# Altium PCB Lora_Count.PcbDoc
Units mm, origin at the board's own origin, x right, y up, seen from the top; angles counter-clockwise.
Board outline 53.3 x 32 mm, 2 copper layers (Top Layer, Bottom Layer), stack 1.481 mm thick; 67 components, 53 nets, 243 pads, 241 vias.
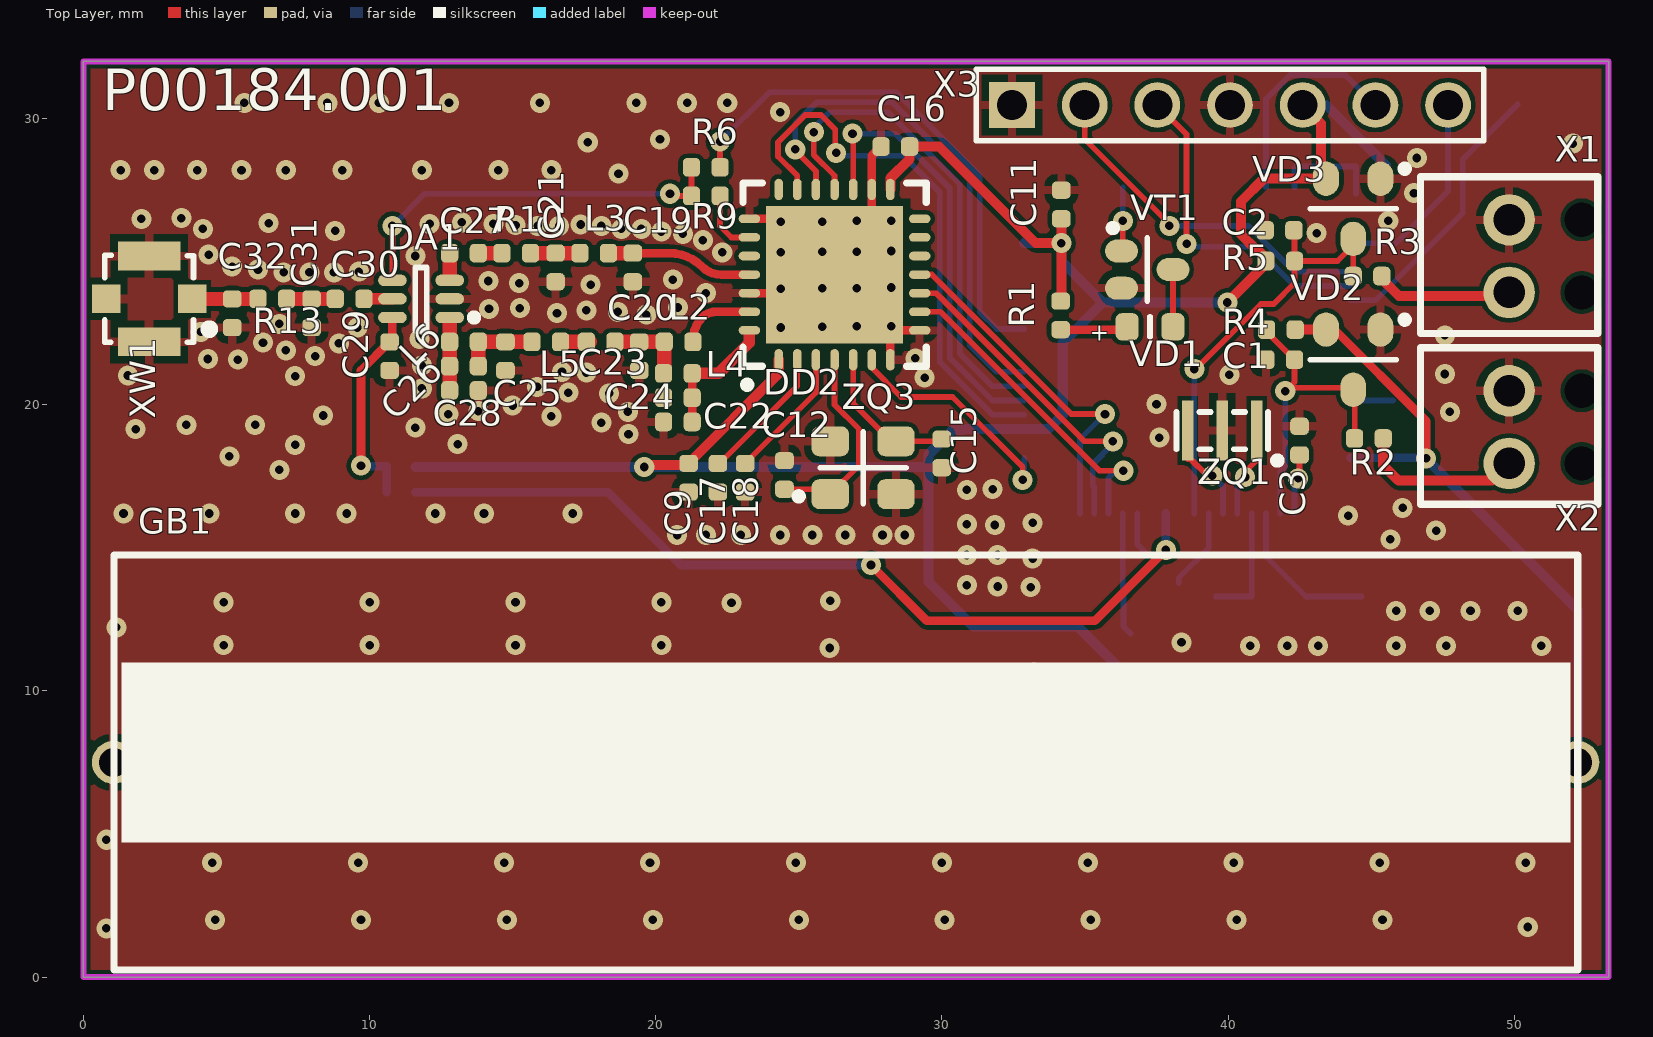
[diagram p0: Top Layer view]
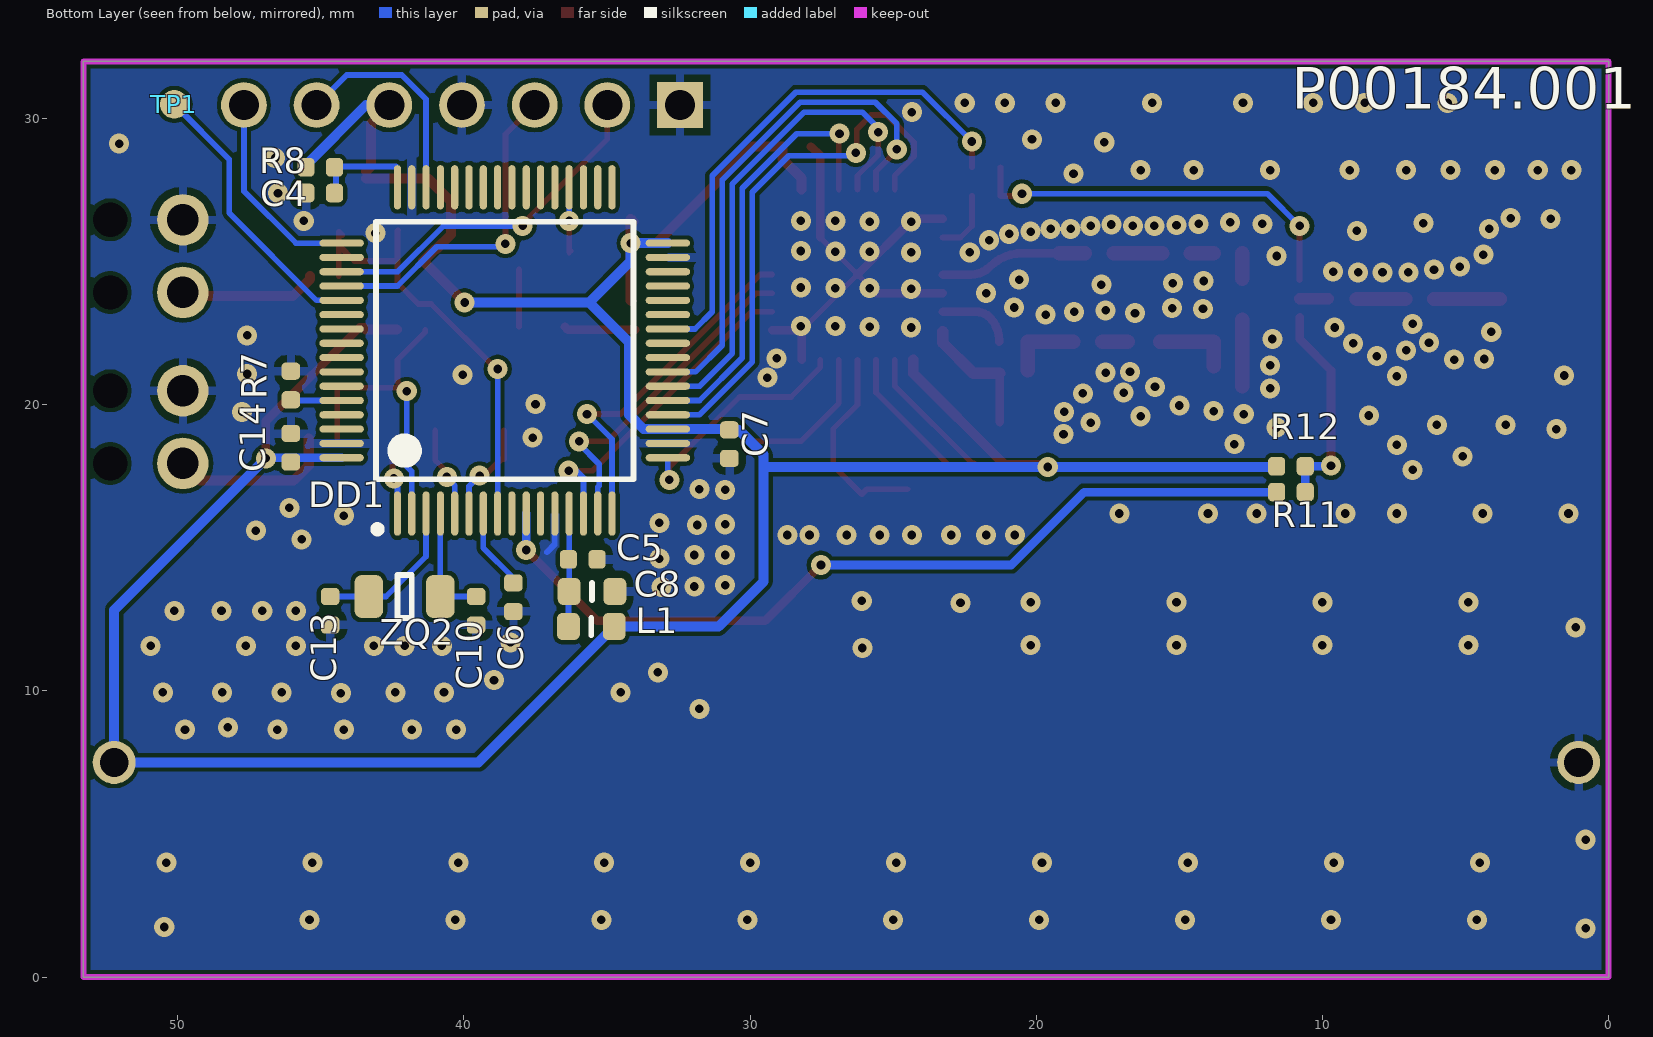
[diagram p1: Bottom Layer view, seen from below]
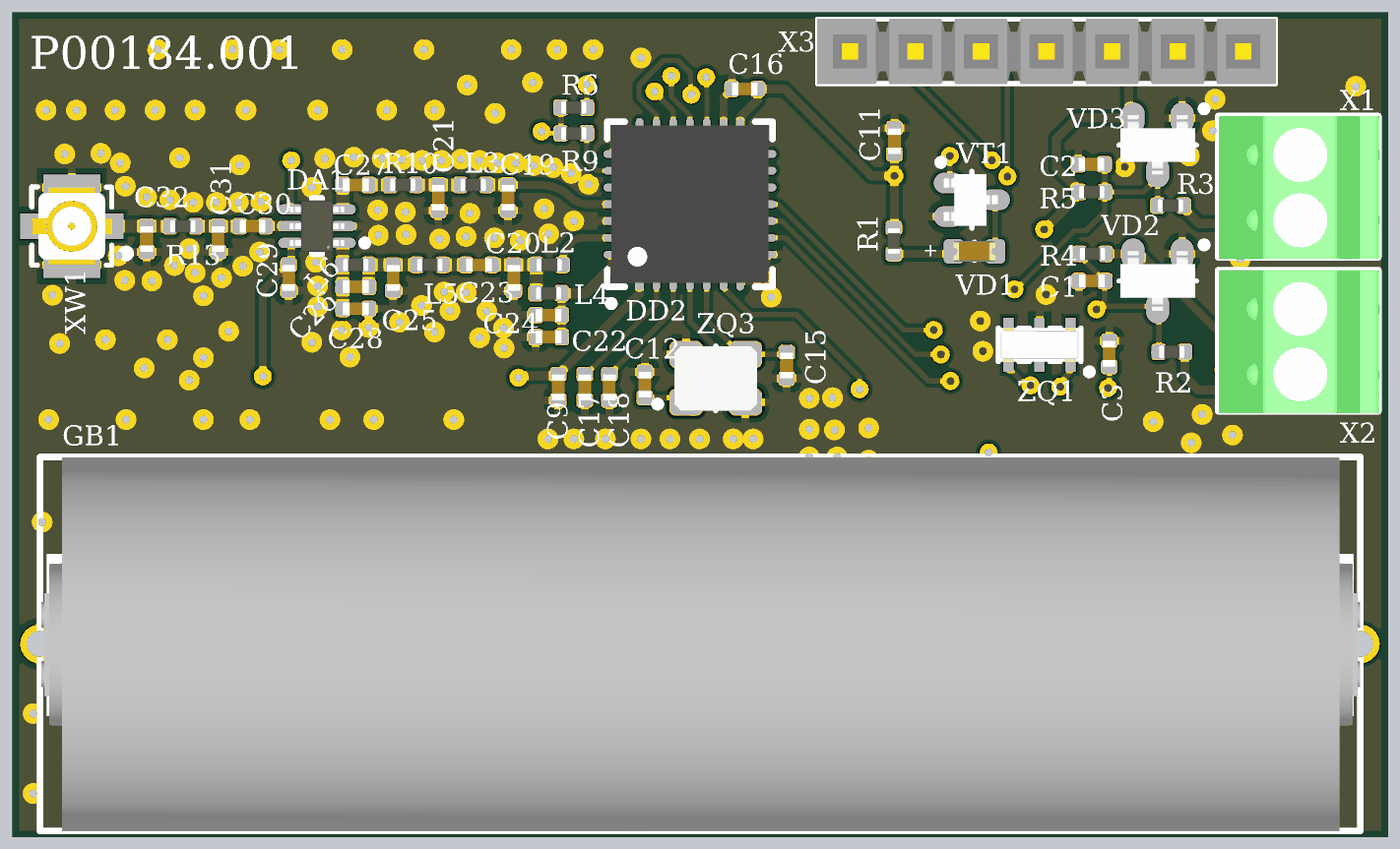
[diagram p2: 3D render of the assembled board from above, using the file's embedded part models]
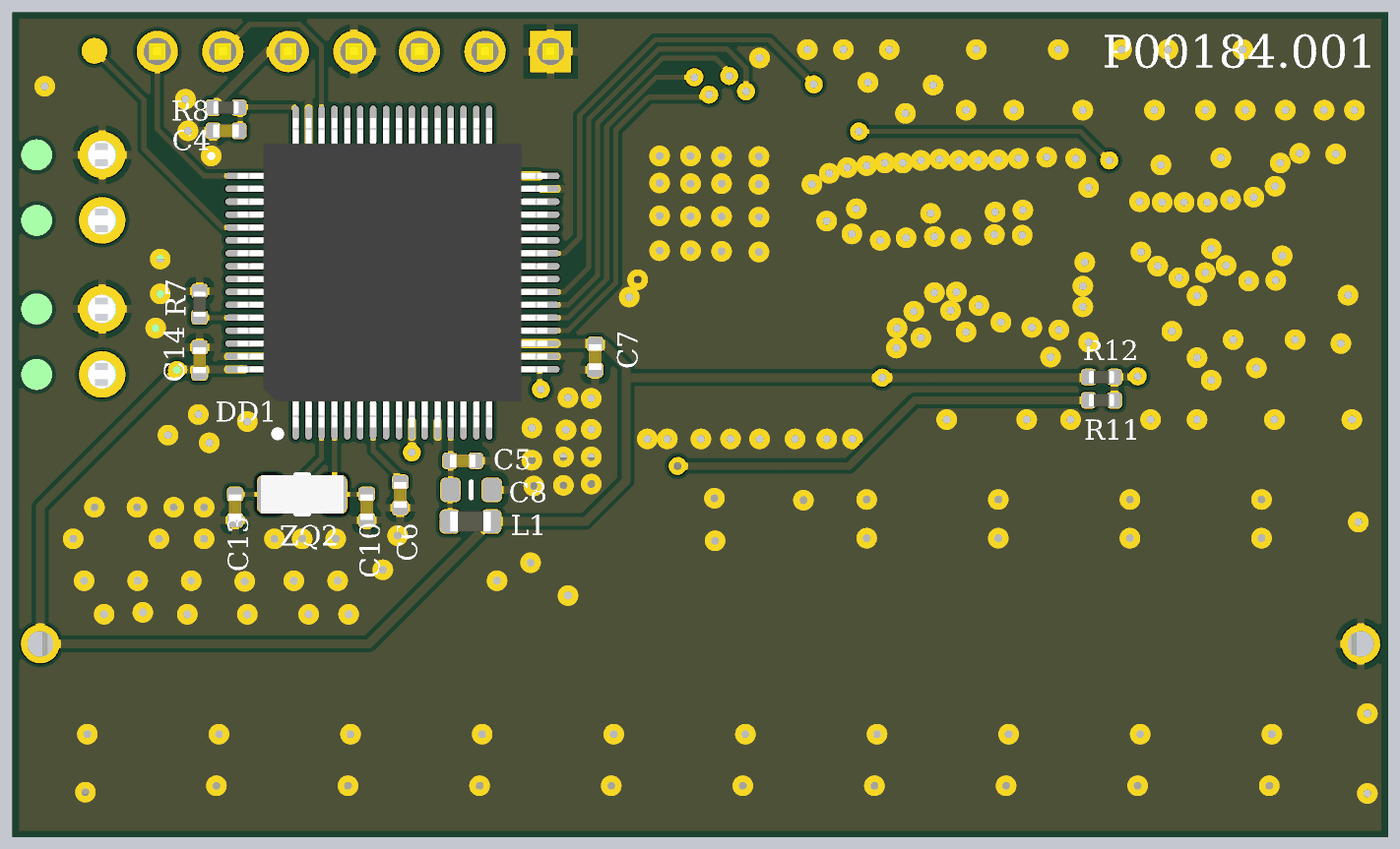
[diagram p3: 3D render of the assembled board from below, using the file's embedded part models]

## Layer stack, top to bottom
Top Solder: solder mask 0.0102, Solder Resist, Dk 3.5
Top Layer: signal copper 0.0356
Dielectric 1: dielectric 1.41, FR-4, Dk 4.8
Bottom Layer: signal copper 0.0356
Bottom Solder: solder mask 0.0102, Solder Resist, Dk 3.5

## Board outline
0,0 53.3,0 53.3,32 0,32

## Design rules (kind name [scope] priority, off if disabled: settings)
AssemblyTestPointUsage [All] p1 off:
AssemblyTestpoint [All] p1 off: testpointundercomponent=TRUE minsize=1.016 maxsize=2.54 preferedsize=1.524 minholesize=0 maxholesize=1.016 preferedholesize=0.813 testpointgrid=0.025 usegrid=TRUE gridtolerance=0 allowsidetop=TRUE allowsidebottom=TRUE
Clearance Galvanica [InNet('485_GND') vs InNet('GND')or InNet('GPIO3') or InNet('GPO')] p1: gap=0.5
Clearance [InComponent('DA1')] p2: gap=0.15
Clearance mid [OnLayer('Mid-Layer 1')      or OnLayer('Mid-Layer 2') vs IsKeepOut] p3: gap=0.5
Clearance NC_to_All [(ObjectKind = 'Pad') And (Net = 'No Net') And (HoleDiameter = PadXSize_AllLayers) And (PadShape_AllLayers = 'Round') And (HoleType = 'Round') vs IsElectrical] p4: gap=0.25
Clearance All_net [All] p5: gap=0.15
ComponentClearance [All] p1 off: gap=0.254 collisioncheckmode=3 verticalgap=0.254 showdistances=FALSE
FabricationTestPointUsage [All] p1 off: valid=0 allowmultiple=FALSE
FabricationTestpoint [All] p1 off: side=3 testpointundercomponent=TRUE minsize=1.016 maxsize=2.54 preferedsize=1.524 minholesize=0 maxholesize=1.016 preferedholesize=0.813 testpointgrid=0.025 allowsidetop=TRUE allowsidebottom=TRUE usegrid=TRUE gridtolerance=0
Height [All] p1 off: minheight=0 maxheight=25.4 prefheight=12.7
HoleSize [All] p1: absolutevalues=TRUE maxlimit=3.5 minlimit=0.025 maxpercent=80.000 minpercent=20.000
MinimumSolderMaskSliver [All] p1: minsoldermaskwidth=0.05
PolygonConnect LDO [InComponent('DA9') vs IsNamedPolygon('power')] p1: connectstyle=Direct reliefconductorwidth=0.254 reliefentries=4 polygonreliefangle="90 Angle" airgapwidth=0.254
PolygonConnect Direct [IsNamedPolygon('POWER')] p2: connectstyle=Direct reliefconductorwidth=0.254 reliefentries=4 polygonreliefangle="90 Angle" airgapwidth=0.254
PolygonConnect DirectVIA_PAD [(IsVia And InNet('GND')) or (IsVia And InNet('485_GND'))] p3: connectstyle=Direct reliefconductorwidth=0.254 reliefentries=4 polygonreliefangle="90 Angle" airgapwidth=0.254
PolygonConnect PolygonConnectALL [All] p4: connectstyle=Relief reliefconductorwidth=0.3 reliefentries=4 polygonreliefangle="90 Angle" airgapwidth=0.254
RoutingLayers AllNets [All] p1: top layer_v5=TRUE bottom layer_v5=TRUE
RoutingPriority RoutingPriority_2 [InNetClass('Signal')] p1: routingpriority=0
RoutingPriority DGND [InNetClass('Digiral GND')] p2: routingpriority=2
RoutingTopology topolGNDPWR [InNetClass('Digiral GND')or InNetClass('DPWR')] p1: topology=Shortest
RoutingTopology Signal [InNetClass('Signal')] p2: topology=Daisy_MidDriven
RoutingTopology Rout220V [InNetClass('220V Line')] p3: topology=Daisy_Simple
RoutingVias RoutingViasGNDPWR [All] p1: holewidth=0.4 width=0.9 viastyle="Through Hole" minholewidth=0.2 minwidth=0.6 maxholewidth=0.5 maxwidth=1.1
RoutingVias RoutingViasDef [All] p2: holewidth=0.4 width=0.9 viastyle="Through Hole" minholewidth=0.2 minwidth=0.6 maxholewidth=0.4 maxwidth=0.9
SilkToSilkClearance [All] p1 off: silktosilkclearance=0.254
SilkToSolderMaskClearance SilkscreenOverComponentPads [IsPad] p1 off: minsilkscreentomaskgap=0.254 clearancetoexposedcopper=TRUE
SolderMaskExpansion Vias [IsVia] p1: expansion=-0.55
SolderMaskExpansion [All] p2: expansion=0.05
Width reper [InComponentClass('reper')] p1: maxlimit=0.254 minlimit=0 preferedwidth=0.254
Width all [All] p2: maxlimit=2 minlimit=0.15 preferedwidth=0.2
17 further rules are at their usual default settings.

## Components (designator, comment, footprint, x,y, rotation, side; value= is the part's Value field where it differs from the comment)
C1 "чип 0402 0.1мкФ/10V," CAPC1005X50(0402) 41.825,21.575 r0 top
C2 "чип 0402 0.1мкФ/10V," CAPC1005X50(0402) 41.8,26.1 r0 top
C3 "чип 0402 0.1мкФ/10V," CAPC1005X50(0402) 42.5,18.75 r270 top
C4 "чип 0402 0.1мкФ/10V," CAPC1005X50(0402) 45.025,27.4 r180 bottom
C5 "чип 0402 0.1мкФ/10V," CAPC1005X50(0402) 35.85,14.6 r0 bottom
C6 "чип 0402 0.1мкФ/10V," CAPC1005X50(0402) 38.275,13.275 r90 bottom
C7 "чип 0402 0.1мкФ/10V," CAPC1005X50(0402) 30.725,18.625 r90 bottom
C8 "чип 0603 4.7мкФ/50V," CAPC1608X50(0603) 35.525,13.475 r0 bottom
C9 "чип 0402 0.1мкФ/10V," CAPC1005X50(0402) 21.15,17.45 r90 top
C10 "чип 0402 10/10V," CAPC1005X50(0402) 39.575,12.8 r90 bottom
C11 "чип 0402 0.1мкФ/10V," CAPC1005X50(0402) 34.175,27 r270 top
C12 "чип 0402 10/10V," CAPC1005X50(0402) 24.5,17.55 r270 top
C13 "чип 0402 10/10V," CAPC1005X50(0402) 44.675,12.8 r90 bottom
C14 "чип 0402 0.1мкФ/10V," CAPC1005X50(0402) 46.05,18.5 r270 bottom
C15 "чип 0402 10/10V," CAPC1005X50(0402) 30,18.3 r90 top
C16 "чип 0402 0.1мкФ/10V," CAPC1005X50(0402) 28.375,29.025 r0 top
C17 "чип 0402 0.1мкФ/10V," CAPC1005X50(0402) 22.175,17.45 r90 top
C18 "чип 0402 0.1мкФ/10V," CAPC1005X50(0402) 23.125,17.45 r90 top
C19 "чип 0402 1.5/10V," CAPC1005X50(0402) 19.2,24.8 r90 top
C20 "чип 0402 8.2/10V," CAPC1005X50(0402) 19.425,21.7 r90 top
C21 "чип 0402 3.3/10V," CAPC1005X50(0402) 16.5,24.8 r90 top
C22 "чип 0402 0.01мкФ/10V," CAPC1005X50(0402) 20.775,19.4 r0 top
C23 "чип 0402 22/10V," CAPC1005X50(0402) 18.075,22.2 r0 top
C24 "чип 0402 47/10V," CAPC1005X50(0402) 20.775,20.25 r0 top
C25 "чип 0402 8.2/10V," CAPC1005X50(0402) 14.75,21.7 r90 top
C26 "чип 0402 1.5/10V," CAPC1005X50(0402) 13.3,21.35 r0 top
C27 "чип 0402 47/10V," CAPC1005X50(0402) 13.3,25.3 r0 top
C28 "чип 0402 3.3/10V," CAPC1005X50(0402) 13.3,20.5 r180 top
C29 "чип 0402 0.01мкФ/10V," CAPC1005X50(0402) 10.7,21.7 r270 top
C30 "чип 0402 47/10V," CAPC1005X50(0402) 9.3,23.7 r0 top
C31 "чип 0402 NC/10V," CAPC1005X50(0402) 7.975,23.2 r270 top
C32 "чип 0402 NC/10V," CAPC1005X50(0402) 5.2,23.2 r270 top
DA1 "PE4259" SOT65P210X110-6N(SOT363) 11.8,23.7 r180 top
DD1 "STM32l073RZT" TSQFP50P1200X1200X160-64N 38.575,21.9 r90 bottom
DD2 "SX1272IMLTRT" QFN65P600X600X100_HS-29N 26.25,24.55 r90 top
GB1 "ER14505-VY" ER14505-VY 52.225,7.5 r180 top
L1 "BLM18AG121SN1D" RESC1608X45(0603) 35.55,12.25 r0 bottom
L2 "2.7нГн" RESC1005X35(0402) 20.8,22.2 r180 top
L3 "10нГн" RESC1005X35(0402) 17.85,25.3 r180 top
L4 "33нГн" RESC1005X35(0402) 20.775,21.1 r0 top
L5 "5.6нГн" RESC1005X35(0402) 16.175,22.2 r180 top
L6 "5.6нГн" RESC1005X35(0402) 13.3,22.2 r180 top
R1 "чип 0402 200 5%" RESC1005X35(0402) 34.15,23.125 r270 top
R2 "чип 0402 10k 5%" RESC1005X35(0402) 44.925,18.825 r0 top
R3 "чип 0402 10k 5%" RESC1005X35(0402) 44.875,24.5 r0 top
R4 "чип 0402 1M 5%" RESC1005X35(0402) 41.85,22.625 r180 top
R5 "чип 0402 1M 5%" RESC1005X35(0402) 41.825,25.025 r0 top
R6 "чип 0402 10 5%" RESC1005X35(0402) 21.75,28.3 r180 top
R7 "чип 0402 0 5%" RESC1005X35(0402) 46.05,20.675 r270 bottom
R8 "чип 0402 0 5%" RESC1005X35(0402) 45.025,28.3 r180 bottom
R9 "чип 0402 10 5%" RESC1005X35(0402) 21.75,27.3 r180 top
R10 "чип 0402 0 5%" RESC1005X35(0402) 15.125,25.3 r180 top
R11 "чип 0402 0 5%" RESC1005X35(0402) 11.1,16.95 r0 bottom
R12 "чип 0402 0 5%" RESC1005X35(0402) 11.1,17.85 r0 bottom
R13 "чип 0402 0 5%" RESC1005X35(0402) 6.6,23.7 r180 top
TP1 "TX_Uart5" TEST_POINT 50.125,30.5 r270 bottom
VD1 "чип 0603 LED (RED)" LEDC1608X80N(0603)_red 37.275,22.725 r180 top
VD2 "BAV99-7-F" SOT95P230-3N(SOT23)_NUM 44.375,21.575 r270 top
VD3 "BAV99-7-F" SOT95P230-3N(SOT23)_NUM 44.375,26.85 r270 top
VT1 "MUN5211T1G" "SOT65P200X110-3N (SOT323)_NUM" 37.175,24.725 r0 top
X1 "DG308-2.54-2P" DG308-2.54-2P 49.825,23.925 r90 top
X2 "DG308-2.54-2P" DG308-2.54-2P 49.825,17.95 r90 top
X3 "PLS-7" HEADER1-7P2.54 32.45,30.475 r0 top
XW1 "73412-0110" 73412-0110 2.3,23.7 r90 top
ZQ1 "CSTCE8M00G52A-R0(4 МГц)" "XTAL320X130X120 (CSTCE_G15C)" 39.8,19.1 r180 top
ZQ2 "DST310S(32.768 KHz)" XTAL320X150X90-2N(DST) 42.075,13.3 r0 bottom
ZQ3 "KX-7T-12.88662 12MHz(32MHz)" XTAL320X250X78-4N(ADM8) 27.25,17.8 r0 top

## Footprints (in the part's own frame and the unit in brackets; to place one, negate y for a bottom-side part, rotate by r counter-clockwise, add the part's x,y. Pads: shape width x height; smd on the part's side, far side on the other; paste and mask are expansions set on the pad)
73412-0110 [mm] "Micro coaxial connector receptacle vertical"
  rect 1x1 smd: 1(0,-1.5) 2(0,1.5)
  rect 1x2.2 smd: 2(-1.5,0) 2(1.5,0)
  silkscreen extent -1.51,-2.16 1.53,1.55, body extent -1.5,-1.55 1.5,1.55, height 1.25
CAPC1005X50(0402) [mm]
  rrect50% 0.6x0.65 smd paste-0.025: 1(-0.5,0) 2(0.5,0)
  body extent -0.5,-0.25 0.5,0.25, height 0.6
CAPC1608X50(0603) [mm]
  rrect50% 0.8x0.95 smd paste-0.025: 1(-0.8,0) 2(0.8,0)
  silkscreen extent 0,-0.3 0,0.3, body extent -0.8,-0.4 0.8,0.4, height 0.5
DG308-2.54-2P [mm]
  round 0 hole 1.2 unplated: 0(0,-2.54) 0(2.54,-2.54)
  round 1.8 hole 1.1: 1(0,0) 2(2.54,0)
  silkscreen extent -1.43,-3.1 4.05,3.1, body extent -1.5,-3.13 4.04,3.07, height 8.5
ER14505-VY [mm]
  round 1.5 hole 1: 1(0,0) 2(51.175,0)
  silkscreen extent 0,-7.25 51.16,7.25, body extent 0,-7.22 51.1,7.28, height 15.74
HEADER1-7P2.54 [mm]
  rect 1.6x1.6 hole 1.05: 1(0,0)
  round 1.6 hole 1.05: 2(2.54,0) 3(5.08,0) 4(7.62,0) 5(10.16,0) 6(12.7,0) 7(15.24,0)
  silkscreen extent -1.25,-1.25 16.49,1.25, body extent -1.27,-1.27 16.51,1.27, height 8.14
LEDC1608X80N(0603)_red [mm]
  rrect50% 0.8x0.95 smd: A(0.8,0) C(-0.8,0)
  silkscreen extent 0,-0.35 0,0.35, body extent -0.81,-0.4 0.81,0.4, height 0.6
QFN65P600X600X100_HS-29N [mm] "QFN, 28-Leads, Body 6.00x6.00mm, Pitch 0.65mm, Thermal Pad 4.80x4.80mm, IPC Medium Density"
  oval 0.75x0.3 smd: 1(-2.975,1.95) 2(-2.975,1.3) 3(-2.975,0.65) 4(-2.975,0) 5(-2.975,-0.65) 6(-2.975,-1.3) 7(-2.975,-1.95) 15(2.975,-1.95) 16(2.975,-1.3) 17(2.975,-0.65) 18(2.975,0) 19(2.975,0.65) 20(2.975,1.3) 21(2.975,1.95)
  oval 0.3x0.75 smd: 8(-1.95,-2.975) 9(-1.3,-2.975) 10(-0.65,-2.975) 11(0,-2.975) 12(0.65,-2.975) 13(1.3,-2.975) 14(1.95,-2.975) 22(1.95,2.975) 23(1.3,2.975) 24(0.65,2.975) 25(0,2.975) 26(-0.65,2.975) 27(-1.3,2.975) 28(-1.95,2.975)
  rect 4.8x4.8 smd: 29(0,0)
  silkscreen extent -3.97,-3.2 3.2,3.2, body extent -3.05,-3.05 3.05,3.05, height 1
RESC1005X35(0402) [mm]
  rrect50% 0.6x0.65 smd paste-0.025: 1(-0.5,0) 2(0.5,0)
  body extent -0.5,-0.25 0.5,0.25, height 0.38
RESC1608X45(0603) [mm]
  rrect50% 0.8x0.95 smd paste-0.025: 1(-0.8,0) 2(0.8,0)
  silkscreen extent 0,-0.3 0,0.3, body extent -0.8,-0.4 0.8,0.4, height 0.5
"SOT65P200X110-3N (SOT323)_NUM" [mm]
  oval 1.15x0.8 smd: 1(-0.9,0.65) 2(-0.9,-0.65) 3(0.9,0)
  silkscreen extent -1.32,-1.1 0,1.57, body extent -1.1,-1 1,1, height 0.95
SOT65P210X110-6N(SOT363) [mm]
  oval 1x0.4 smd: 1(-1,0.65) 2(-1,0) 3(-1,-0.65) 4(1,-0.65) 5(1,0) 6(1,0.65)
  silkscreen extent -1.98,-1.1 0.2,1.1, body extent -1.05,-1 1.05,1, height 0.95
SOT95P230-3N(SOT23)_NUM [mm]
  oval 1.2x0.9 smd: 1(-1.05,0.95) 2(-1.05,-0.95) 3(1.05,0)
  silkscreen extent -1.52,-1.5 0,1.92, body extent -1.15,-1.45 1.15,1.45, height 1.01
TEST_POINT [mm]
  round 1 smd paste-1: 1(0,0)
TSQFP50P1200X1200X160-64N [mm]
  oval 1.55x0.25 smd: 1(-5.7,3.75) 2(-5.7,3.25) 3(-5.7,2.75) 4(-5.7,2.25) 5(-5.7,1.75) 6(-5.7,1.25) 7(-5.7,0.75) 8(-5.7,0.25) 9(-5.7,-0.25) 10(-5.7,-0.75) 11(-5.7,-1.25) 12(-5.7,-1.75) 13(-5.7,-2.25) 14(-5.7,-2.75) 15(-5.7,-3.25) 16(-5.7,-3.75) 33(5.7,-3.75) 34(5.7,-3.25) 35(5.7,-2.75) 36(5.7,-2.25) 37(5.7,-1.75) 38(5.7,-1.25) 39(5.7,-0.75) 40(5.7,-0.25) 41(5.7,0.25) 42(5.7,0.75) 43(5.7,1.25) 44(5.7,1.75) 45(5.7,2.25) 46(5.7,2.75) 47(5.7,3.25) 48(5.7,3.75)
  oval 0.25x1.55 smd: 17(-3.75,-5.7) 18(-3.25,-5.7) 19(-2.75,-5.7) 20(-2.25,-5.7) 21(-1.75,-5.7) 22(-1.25,-5.7) 23(-0.75,-5.7) 24(-0.25,-5.7) 25(0.25,-5.7) 26(0.75,-5.7) 27(1.25,-5.7) 28(1.75,-5.7) 29(2.25,-5.7) 30(2.75,-5.7) 31(3.25,-5.7) 32(3.75,-5.7) 49(3.75,5.7) 50(3.25,5.7) 51(2.75,5.7) 52(2.25,5.7) 53(1.75,5.7) 54(1.25,5.7) 55(0.75,5.7) 56(0.25,5.7) 57(-0.25,5.7) 58(-0.75,5.7) 59(-1.25,5.7) 60(-1.75,5.7) 61(-2.25,5.7) 62(-2.75,5.7) 63(-3.25,5.7) 64(-3.75,5.7)
  silkscreen extent -6.37,-4.5 4.5,4.58, body extent -6,-6 6,6, height 1.56
"XTAL320X130X120 (CSTCE_G15C)" [mm] "Ceramic Resonators CSTCE_G15C"
  rect 0.4x2.1 smd: 1(-1.2,0) 2(0,0) 3(1.2,0)
  silkscreen extent -1.97,-0.65 1.6,1.1, body extent -1.6,-0.65 1.6,0.65, height 0.7
XTAL320X150X90-2N(DST) [mm]
  rrect50% 1x1.5 smd paste-0.025 mask+0.1: 1(-1.25,0) 2(1.25,0)
  silkscreen extent -0.25,-0.75 0.25,0.75, body extent -1.6,-0.75 1.6,0.75, height 0.9
XTAL320X250X78-4N(ADM8) [mm]
  rrect50% 1.3x1.05 smd paste-0.025 mask+0.1: 1(-1.15,-0.925) 2(1.15,-0.925) 3(1.15,0.925) 4(-1.15,0.925)
  silkscreen extent -2.37,-1.25 1.5,1.25, body extent -1.6,-1.25 1.6,1.25, height 0.7

## Part data
C1 C2 C3 C4 C5 C6 C7 C9 C10 C11 C12 C13 C14 C15 C16 C17 C18 C19 C20 C21 C22 C23 C24 C25 C26 C27 C28 C29 C30 C31 C32: library part C0402, "C0402"
C8: library part C0603, "C0603"
DA1: "SOT363 RF Switch IC General Purpose SPDT 50 Ohm"
DD1: "LQFP-64 Ultra-low-power 32-bit MCU ARM®-based Cortex®-M0+, up to 192KB  Flash, 20KB SRAM, 6KB EEPROM, LCD, USB, ADC, DACs"
DD2: "SX1272/73 - 860 MHz to 1020 MHz Low Power Long Range Transceiver"
L1: library part L0603, "Chip coil 0603"
L2 L3 L4 L5 L6: library part L0402, "Chip coil 0402"
R1 R2 R3 R4 R5 R6 R7 R8 R9 R10 R11 R12 R13: library part R0402, "R0402"
TP1: library part TEST_POINT, "TEST_POINT"
VD1: library part "LED 0603", "LED 0603"
VD2 VD3: library part BAV99, "BAV99"
VT1: "MUN5211T1"
X3: "Pin Header Single Row 7 pins"
XW1: "Micro coaxial connector receptacle vertical"
ZQ1: library part "XTAL, SMD, 3.2mm x 1.3mm, 3 pads", "CSTCE_G CERALOCK Ceramic Resonators"
ZQ2: library part "XTAL, SMD, 3.2mm x 1.5mm, 2 pads", "DST310S"
ZQ3: library part "XTAL, SMD, 3.2mm x 2.5mm, 4 pads", "KX-7T series"

## Via types
v1: diameter 0.7, hole 0.3, Top Layer to Bottom Layer, 241 vias

## Nets (pads, with @x,y where several pads share a name; then routed paths per layer and width w, separated by ;. In a path a pad name is that pad's centre, name@x,y a point inside that pad or via, vN(x,y) a via of type N, cw(c..) or ccw(c..) an arc to the next point about the centre after c; other vN are vias at no path point)
3.6V: C7.2 C9.2 C11.2 C14.2 C16.2 DD1.19 DD1.32 DD1.64 DD2.1 DD2.15 GB1.1 L1.1 R1.1 R4.1 R5.1 R8.1 R12.2 VD2.2 VD3.2 X3.5 | length 120.9
  Top Layer w0.3: VD2.2@43.475,22.7 43.65,22.7 46.925,19.425 v1(46.925,18.125)
  Top Layer w0.35: v1@19.6,17.9 21.1,17.9 C9.2 24.3,21.1 DD2.1 ; DD2.15 28.2,27.917 28.875,28.592 C16.2 29.9,29.025 33.275,25.65 v1(34.175,25.65) ; C11.2@34.075,26.4 C11.2 v1(34.175,25.65) ; R1.1 34.175,23.65 v1(34.175,25.65) ; v1(39.975,23.575) 41.425,25.025 41,25.45 40.953,25.45 40.453,25.95 40.453,27.103 41.25,27.9 VD3.2 ; R4.1 43.4,22.625 43.425,22.65 VD2.2 ; X3.5 43.25,29.835 43.25,28.325 VD3.2@43.425,28.15
  Bottom Layer w0.3: DD1.64 v1@46.9,18.15
  Bottom Layer w0.35: R12.2@11.6,17.825 29.525,17.825 ; DD1.32 v1(34.175,25.65) 34.175,25.025 35.625,23.575 ; v1(39.975,23.575) 35.625,23.575 ; X3.5 43.425,30.475 45.525,28.375 R8.1 ; v1@46.9,18.15 v1(46.925,18.125) 52.225,12.825 GB1.1 39.5,7.5 L1.1 31.1,12.25 29.525,13.825 29.525,18.256 30.394,19.125 C7.2 30.75,19.15 DD1.19 33.725,19.15 34.225,19.65 34.225,22.175 35.625,23.575
  other v1: 19.6,17.825
CTRL_SWITCH: DA1.4 R6.2 R9.2 | length 13.8
  Top Layer w0.2: DA1.4 v1(10.8,26.25) ; v1(20.5,27.375) 20.575,27.3 R9.2 R6.2
  Bottom Layer w0.2: v1(10.8,26.25) 11.925,27.375 v1(20.5,27.375)
DEBUG_RX: DD1.52 X3.3 | length 11.7
  Top Layer w0.2: X3.3 38.552,29.453 v1(38.552,25.626)
  Bottom Layer w0.2: v1(38.552,25.626) 38.552,25.523 40.95,25.523 42.324,24.15 DD1.52
DEBUG_TX: DD1.51 X3.2 | length 12.4
  Top Layer w0.2: X3.2 34.99,29.285 37.952,26.323 v1(37.952,26.251)
  Bottom Layer w0.2: v1(37.952,26.251) 40.717,26.251 42.319,24.65 DD1.51
DIO0: DD1.14 DD2.9 | length 11.3
  Top Layer w0.2: DD2.9 29.95,23.25 35.505,17.695 v1(36.346,17.695)
  Bottom Layer w0.2: DD1.14 35.825,17.45 36.07,17.695 v1(36.346,17.695)
DIO1: DD1.15 DD2.10 | length 11.7
  Top Layer w0.2: DD2.10 29.805,23.9 34.98,18.725 v1(35.975,18.725)
  Bottom Layer w0.2: DD1.15 35.325,17.125 35.275,17.175 35.275,17.925 35.975,18.625 v1(35.975,18.725)
DIO2: DD1.16 DD2.11 | length 12.3
  Top Layer w0.2: DD2.11 29.65,24.55 34.525,19.675 v1(35.7,19.675)
  Bottom Layer w0.2: DD1.16 34.825,18.8 v1(35.7,19.675)
EN_SWITCH: DD1.10 R11.2 | length 30.4
  Top Layer w0.3: v1(27.525,14.4) 29.475,12.45 35.35,12.45 v1(37.825,14.925)
  Bottom Layer w0.3: R11.2 18.325,16.95 20.875,14.4 v1(27.525,14.4) ; v1(37.825,14.925) DD1.10
GND: C1.1 C2.1 C3.1 C4.1 C5.1 C6.1 C7.1 C8.1 C9.1 C10.1 C11.1 C12.1 C13.1 C14.1 C15.1 C16.1 C17.1 C18.1 C19.1 C20.1 C21.1 C22.1 C24.1 C25.1 C28.1 C29.2 C31.2 C32.2 DA1.2 DD1.12 DD1.18 DD1.31 DD1.47 DD1.63 DD2.7 DD2.8 DD2.16 DD2.22 DD2.26 DD2.29 GB1.2 R7.1 VD2.1 VD3.1 VT1.2 X1.2 X2.2 X3.1 X3.4 XW1.2 ZQ1.2 ZQ3.2 ZQ3.4 | length 18.4
  Top Layer w0.2: DD2.29@25.6,23.9 DD2.29 ; DD2.29@27.55,25.85 DD2.29 ; DD2.29@28.2,22.6 DD2.29
  Top Layer w0.3: DD2.26 DD2.29@25.6,23.9 ; DD2.22 24.3,26.5 DD2.29 ; DD2.29@27.55,25.85 DD2.16 27.55,28.7 C16.1 ; DD2.7 28.2,22.6 DD2.8
  Bottom Layer w0.2: DD1.12 36.825,15.125 37.1,14.85
  other v1: 0.8,1.7 50.475,1.75 4.6,2 9.7,2 14.8,2 19.9,2 25,2 30.1,2 35.2,2 40.3,2 45.4,2 4.5,4 9.6,4 14.7,4 19.8,4 24.9,4 30,4 35.1,4 40.2,4 45.3,4 50.4,4 0.8,4.8 40.275,8.65 41.825,8.65 44.2,8.65 46.525,8.65 49.75,8.65 48.25,8.725 31.775,9.375 44.3,9.925 34.525,9.95 40.7,9.95 42.4,9.95 46.375,9.95 48.45,9.95 50.525,9.95 38.95,10.375 33.225,10.65 26.075,11.5 40.775,11.575 42.075,11.575 43.15,11.575 45.875,11.575 47.625,11.575 50.95,11.575 4.9,11.6 10,11.6 15.1,11.6 20.2,11.6 38.375,11.7 1.15,12.225 45.875,12.8 47.05,12.8 48.475,12.8 50.125,12.8 22.65,13.075 4.9,13.1 10,13.1 15.1,13.1 20.2,13.1 26.1,13.15 33.1,13.625 31.95,13.65 30.875,13.7 33.175,14.625 30.875,14.75 31.95,14.75 45.675,15.3 20.75,15.45 21.75,15.45 22.975,15.45 24.35,15.45 25.475,15.45 26.625,15.45 27.926,15.451 28.7,15.45 47.275,15.6 31.85,15.8 30.875,15.825 33.175,15.875 44.2,16.125 1.4,16.2 4.4,16.2 7.4,16.2 9.2,16.2 12.3,16.2 14,16.2 17.1,16.2 46.1,16.4 30.875,17.025 31.775,17.05 6.85,17.725 5.1,18.2 7.4,18.6 13.075,18.625 37.6,18.85 19.05,18.975 1.825,19.15 11.6,19.2 3.6,19.3 6,19.3 18.1,19.375 16.35,19.6 8.375,19.625 12.75,19.675 19.025,19.75 47.75,19.75 13.8,19.775 15,19.975 37.5,20.025 18.375,20.4 16.95,20.425 11.825,20.575 15.85,20.625 29.4,20.95 7.4,21 1.55,21.025 40.05,21.05 47.575,21.075 17.575,21.125 16.725,21.15 11.825,21.375 5.4,21.575 4.35,21.6 29.075,21.625 8.1,21.7 7.075,21.9 8.925,22.15 6.275,22.175 11.75,22.3 47.575,22.425 4.1,22.55 9.575,22.7 24.375,22.7 25.825,22.725 27.025,22.75 28.225,22.75 6.85,22.825 19.675,23.15 16.55,23.2 18.675,23.25 17.575,23.3 14.175,23.35 15.25,23.375 20.775,23.4 21.75,23.9 24.375,24.05 25.825,24.075 27.025,24.075 28.225,24.1 17.725,24.2 15.225,24.25 14.15,24.325 20.6,24.375 7,24.625 7.9,24.625 8.75,24.625 9.625,24.65 6.1,24.725 5.2,24.825 11.6,25.2 4.375,25.25 22.325,25.325 24.375,25.325 25.825,25.35 27.025,25.35 28.225,25.375 21.65,25.75 20.95,25.975 43.1,26 20.2,26.05 8.8,26.075 4.175,26.15 18.8,26.15 19.5,26.15 15.875,26.25 16.625,26.25 18.1,26.25 15.1,26.275 17.375,26.3 12.1,26.325 14.325,26.325 6.475,26.35 13.225,26.375 24.375,26.4 25.825,26.4 27.025,26.425 28.225,26.425 45.6,26.425 2.025,26.5 3.425,26.525 46.5,27.4 18.7,28.075 1.3,28.2 2.475,28.2 3.975,28.2 5.525,28.2 7.075,28.2 9.05,28.2 11.825,28.2 14.5,28.2 16.35,28.2 46.6,28.625 52.05,29.125 17.625,29.175 20.15,29.275 24.35,30.225 5.625,30.55 8.525,30.55 10.325,30.55 12.775,30.55 15.95,30.55 19.325,30.55 21.1,30.55 22.5,30.55
INPUT: R3.2 X1.1 | length 4.7
  Top Layer w0.35: R3.2 45.375,24.4 45.975,23.8 X1.1@49.7,23.8
MISO: DD1.22 DD2.18 | length 17.5
  Top Layer w0.2: v1(25.526,29.526) 25.526,28.732 26.25,28.009 DD2.18
  Bottom Layer w0.2: v1(25.526,29.526) 25.526,29.676 26.075,30.225 28.115,30.225 30.625,27.715 30.625,21.79 31.765,20.65 DD1.22
MOSI: DD1.23 DD2.19 | length 18.3
  Top Layer w0.2: v1(24.876,28.926) 24.976,28.926 25,28.95 25.104,28.846 25.104,28.659 25.6,28.164 DD2.19
  Bottom Layer w0.2: v1(24.876,28.926) 24.876,29.826 25.625,30.575 28.26,30.575 30.975,27.86 30.975,22.082 31.907,21.15 DD1.23
NetC1_2: C1.2 DD1.2 R2.1 R4.2 VD2.3 | length 10.9
  Top Layer w0.2: R4.2 41.35,22.55 C1.2 42.325,20.8 42.125,20.6 44.425,20.6 R2.1
  Bottom Layer w0.2: DD1.2 41.825,17.674 ; 41.876,17.725 41.95,17.799 42,17.849 v1(42,20.475)
NetC2_2: C2.2 DD1.8 R3.1 R5.2 VD3.3 | length 15.8
  Top Layer w0.2: v1(38.825,21.25) 38.875,21.25 41.15,23.525 41.595,23.525 42.325,24.255 R5.2 ; C2.2 42.325,26.075 R5.2 ; VD3.3@44.25,25.925 44.375,26.05 VD3.3 VD3.3@44.375,25.575 ; R3.1 VD3.3@44.375,25.575 ; R5.2 43.825,25.025 VD3.3@44.375,25.575
  Bottom Layer w0.2: DD1.8 38.825,21.325 v1(38.825,21.25)
NetC3_2: C3.2 DD1.1 | length 2.1
  Top Layer w0.2: v1(42.452,17.426) 42.5,17.474 C3.2
  Bottom Layer w0.2: DD1.1 42.325,17.299 v1(42.452,17.426)
NetC4_2: C4.2 DD1.48 R8.2 | length 3.8
  Bottom Layer w0.2: DD1.48 42.325,28.275 42.375,28.325 44.475,28.325 C4.2@44.475,27.375
NetC5_2: C5.2 C8.2 DD1.13 L1.2 | length 4.3
  Bottom Layer w0.2: DD1.13 36.325,13.5 36.35,13.475 L1.2 L1.2@36.6,12
NetC6_2: C6.2 DD1.7 | length 2.9
  Bottom Layer w0.2: C6.2 38.275,13.95 39.325,15 DD1.7
NetC10_2: C10.2 DD1.4 ZQ2.1 | length 4.2
  Bottom Layer w0.2: C10.2 ZQ2.1 DD1.4
NetC12_2: C12.2 DD2.4 ZQ3.1 | length 7.1
  Top Layer w0.2: C12.2 25.925,17.05 ZQ3.1 27.1,17.875 27.1,19.15 26.25,20 DD2.4
NetC13_2: C13.2 DD1.3 ZQ2.2 | length 5.4
  Bottom Layer w0.2: DD1.3 41.325,14.7 42.725,13.3 ZQ2.2 C13.2
NetC15_2: C15.2 DD2.5 ZQ3.3 | length 5.2
  Top Layer w0.2: DD2.5 26.9,20.05 28.225,18.725 ZQ3.3 29.925,18.725 C15.2
NetC17_2: C17.2 DD2.2 | length 4.8
  Top Layer w0.2: C17.2 22.234,17.95 24.95,20.666 DD2.2
NetC18_2: C18.2 DD2.3 | length 4.7
  Top Layer w0.2: C18.2 25.6,20.425 DD2.3
NetC19_2: C19.2 DD2.25 L3.1 | length 5.2
  Top Layer w0.3: C19.2 20.478,25.3 cw(c20.478,23.678) 21.625,24.825 ccw(c22.289,25.489) 22.289,24.55 DD2.25
  Top Layer w0.5: L3.1@18.3,25.3 C19.2
NetC20_2: C20.2 C23.2 L2.2 L4.1 | length 2.6
  Top Layer w0.5: C23.2@18.7,22.2 19.5,22.2 L2.2 L4.1@20.3,21.2
NetC21_2: C21.2 L3.2 R10.1 | length 1.7
  Top Layer w0.5: R10.1@15.6,25.3 C21.2 L3.2@17.3,25.3
NetC23_1: C23.1 L5.1 | length 0.9
  Top Layer w0.5: L5.1@16.8,22.2 C23.1@17.7,22.2
NetC25_2: C25.2 C26.2 L5.2 L6.1 | length 2.7
  Top Layer w0.5: C26.2 L6.1 C25.2 L5.2
NetC26_1: C26.1 C28.2 DA1.1 L6.2 | length 2.3
  Top Layer w0.5: C28.2@12.8,20.65 L6.2 DA1.1@12.8,22.975
NetC27_1: C27.1 DA1.3 | length 0.9
  Top Layer w0.5: DA1.3@12.8,24.4 C27.1
NetC27_2: C27.2 R10.2 | length 0.8
  Top Layer w0.5: C27.2 R10.2@14.6,25.3
NetC29_1: C29.1 DA1.6 R11.1 R12.1 | length 7.4
  Top Layer w0.3: v1(9.7,17.875) 9.7,21.2 C29.1 10.8,22.3 DA1.6
  Bottom Layer w0.3: v1(9.7,17.875) 9.725,17.85 R12.1 R11.1
NetC30_1: C30.1 C31.1 R13.1 | length 1.7
  Top Layer w0.5: R13.1 C30.1
NetC30_2: C30.2 DA1.5 | length 1
  Top Layer w0.4: C30.2 DA1.5
NetC32_1: C32.1 R13.2 XW1.1 | length 2.3
  Top Layer w0.5: XW1.1 C32.1 R13.2
NetDD1_5: DD1.5 ZQ1.1 | length 3.3
  Top Layer w0.2: v1@40.426,17.476 41,18.05 ZQ1.1
  Bottom Layer w0.2: DD1.5 40.325,17.175 40.602,17.452 v1(40.602,17.476)
NetDD1_6: DD1.6 ZQ1.3 | length 3.4
  Top Layer w0.2: ZQ1.3 38.6,18.1 38.7,18.1 v1@39.275,17.525
  Bottom Layer w0.2: v1(39.45,17.525) 39.825,17.15 DD1.6
NetDD1_26: DD1.26 R6.1 | length 18.5
  Top Layer w0.2: R6.1 v1(22.25,29.2)
  Bottom Layer w0.2: v1(22.25,29.2) 23.975,30.925 28.405,30.925 31.325,28.005 31.325,23.25 31.925,22.65 DD1.26
NetDD1_36: DD1.36 VT1.1 | length 2.3
  Top Layer w0.2: VT1.1 36.325,25.325 v1(36.325,26.425)
  Bottom Layer w0.2: v1(36.325,26.425) DD1.36
NetDD1_53: DD1.53 TP1.1 | length 9.8
  Bottom Layer w0.2: DD1.53 45.15,23.65 48.202,26.702 48.202,28.577 TP1.1
NetDD1_60: DD1.60 R7.2 | length 1.5
  Bottom Layer w0.2: DD1.60 R7.2@45.775,20.15
NetDD2_23: DD2.23 R9.1 | length 2.2
  Top Layer w0.2: R9.1 22.25,26.25 22.65,25.85 DD2.23
NetDD2_27: DD2.27 L2.1 | length 2.6
  Top Layer w0.3: L2.1 21.3,22.265 cw(c22.41,22.265) 21.625,23.05 cw(c22.108,22.567) 22.108,23.25 DD2.27
NetR1_2: R1.2 VD1.A | length 2.5
  Top Layer w0.3: R1.2@34.025,22.625 36.375,22.625 VD1.A
NetVD1_C: VD1.C VT1.3 | length 2
  Top Layer w0.2: VD1.C VT1.3
NSS: DD1.20 DD2.20 | length 19.2
  Top Layer w0.2: DD2.20 24.95,28.004 24.276,28.678 24.276,29.175 25.228,30.126 25.775,30.126 26.276,29.625 26.276,28.831 v1(26.304,28.803)
  Bottom Layer w0.2: v1(26.304,28.803) 26.407,28.7 28.65,28.7 29.925,27.425 29.925,21.5 31.775,19.65 DD1.20
RESET_LORA: DD1.17 DD2.6 | length 8.2
  Top Layer w0.2: DD2.6 27.55,21.3 28.575,20.275 30.375,20.275 32.825,17.825 v1(32.825,17.375)
  Bottom Layer w0.2: v1(32.825,17.375) 32.875,17.425 DD1.17
SCK: DD1.21 DD2.17 | length 15.3
  Top Layer w0.2: v1(26.876,29.474) 26.904,29.446 26.904,27.529 DD2.17
  Bottom Layer w0.2: v1(26.876,29.474) 28.371,29.474 30.275,27.57 30.275,21.645 31.77,20.15 DD1.21
SWCLK: DD1.49 X3.7 | length 7.2
  Bottom Layer w0.2: DD1.49 45.875,25.65 47.69,27.465 X3.7
SWDIO: DD1.46 X3.6 | length 7.7
  Bottom Layer w0.2: DD1.46 41.325,30.675 42.175,31.525 44.1,31.525 X3.6
TAMPER: R2.2 X2.1 | length 5.8
  Top Layer w0.35: R2.2 45.425,17.875 45.95,17.35 49.225,17.35 X2.1
VRPA: C22.2 C24.2 DD2.28 L4.2 | length 4.5
  Top Layer w0.3: C22.2 C24.2 L4.2
  Top Layer w0.4: L4.2 22.2,21.1 23.275,22.175 DD2.28@23.275,22.55
pads on no net: DD1.9 DD1.11 DD1.24 DD1.25 DD1.27 DD1.28 DD1.29 DD1.30 DD1.33 DD1.34 DD1.35 DD1.37 DD1.38 DD1.39 DD1.40 DD1.41 DD1.42 DD1.43 DD1.44 DD1.45 DD1.50 DD1.54 DD1.55 DD1.56 DD1.57 DD1.58 DD1.59 DD1.61 DD1.62 DD2.12 DD2.13 DD2.14 DD2.21 DD2.24 X1.0 X2.0

## Polygon pours and split planes (outlines as drawn)
GND on Bottom Layer "gnd" (solid, remove dead copper, pour order 0): 0,0 0,32 53.3,32 53.3,0
GND on Top Layer "gnd" (solid, remove dead copper, pour order 2): 0,0 0,32.005 53.3,32.005 53.3,0

## Keep-outs
Keep-Out Layer:
  the board outline again, w0.2

## Silkscreen, mask and mechanical layers (free items; w line width, h text height)
Top Overlay:
  rectangle: 1.325,4.7 51.975,11
  text "P00184.001" at 0.65,29.8 h2.5
Bottom Overlay:
  text "P00184.001" at 11.075,29.85 h2.5

## Text inside footprints (layer, text, board x,y; h text height)
VD1: Top Overlay "+" at 35.85,22.95 h1 r180; Mechanical 1 "+" at 36.25,23.875 h1 r180